# EAGLE board tiny_25_45_85 (EAGLE 6.6.0)
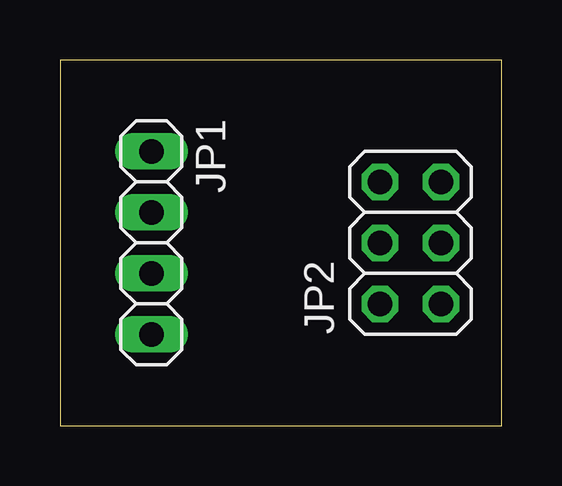
[diagram p0: board, top side]
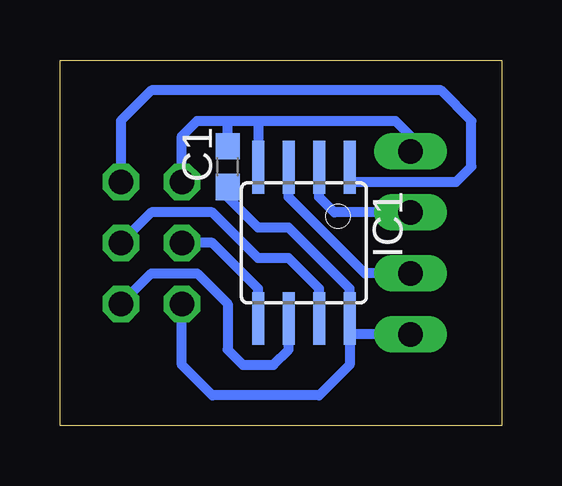
[diagram p1: board, bottom side, seen from below]

Size 18.41 x 15.24 mm. Coordinates in mm from the lower left corner, seen from the top.
Outline: 0,15.24 0,0 18.41,0 18.41,15.24 0,15.24
Copper layers (1*16): Top 0.035mm / dielectric 1.5mm / Bottom 0.035mm
Design rules "plotter *": minimum track width 10mil, minimum drill 24mil, track to track 12mil, track to pad 12mil, pad to pad 12mil, via to via 12mil, smd to smd 8mil, copper to edge 0mil, drill to drill 8mil, minimum pad ring 10mil, minimum via ring 8mil, stop-mask expansion 4mil, vias tented up to drill 0mil, thermal gap 10mil

## Footprints (pad centres in the part's own frame; a part is rotated, then mirrored left to right if it is on the bottom)
C0603 = smd 1.1 x 1: 1 -0.85,0; 2 0.85,0
SOIC8 = smd 0.5 x 2.2: 1 -1.905,-3.154; 2 -0.645,-3.154; 3 0.625,-3.154; 4 1.895,-3.154; 5 1.905,3.154; 6 0.635,3.154; 7 -0.635,3.154; 8 -1.905,3.154
1X04 = drill 1.016 long: 1 -3.81,0; 2 -1.27,0; 3 1.27,0; 4 3.81,0
2X03 = drill 1.016 octagon: 1 -2.54,-1.27; 2 -2.54,1.27; 3 0,-1.27; 4 0,1.27; 5 2.54,-1.27; 6 2.54,1.27

## Placement (x,y rotation side)
C1  [C0603]  11.43,10.79 90 bottom
IC1  TINY22S  [SOIC8]  8.26,7.62 180 bottom
JP1  [1X04]  3.81,7.62 270 top
JP2  [2X03]  14.61,7.62 90 top

## Library data of the parts
C1 = resistor
IC1 = atmel; OC_FARNELL: unknown; OC_NEWARK: unknown
JP1 JP2 = pinhead

## Nets
GND: C1.2 IC1.4 JP1.1 JP2.6
N$1: IC1.3 JP1.3
N$2: IC1.2 JP1.2
N$3: IC1.1 JP2.5
N$7: IC1.5 JP2.4
N$8: IC1.6 JP2.1
N$9: IC1.7 JP2.3
VCC: C1.1 IC1.8 JP1.4 JP2.2

## Tracks (layer width: path | path; a pad name or v marks a point on that pad's centre or on a via)
GND
  Bottom 0.406: JP2.6 13.34,12.06 12.7,12.7 11.43,12.7 | 10.16,12.7 4.45,12.7 3.81,12.06 JP1.1 | C1.2 11.43,12.7 | 11.43,12.7 10.16,12.7 | 10.16,12.7 10.16,10.78 IC1.4
N$1
  Bottom 0.406: JP1.3 5.71,6.35 8.89,9.53 IC1.3
N$2
  Bottom 0.406: JP1.2 6.99,8.89 7.62,9.53 IC1.2
N$3
  Bottom 0.406: IC1.1 6.35,10.16 1.91,10.16 1.27,10.79 1.27,12.7 2.54,13.97 14.61,13.97 15.88,12.7 JP2.5
N$7
  Bottom 0.406: IC1.5 10.16,5.71 12.06,7.62 JP2.4
N$8
  Bottom 0.406: JP2.1 14.61,6.35 12.7,6.35 11.43,5.08 11.43,3.17 10.79,2.54 9.53,2.54 8.89,3.17 IC1.6
N$9
  Bottom 0.406: IC1.7 7.62,5.71 8.89,6.99 10.16,6.99 12.06,8.89 14.61,8.89 JP2.3
VCC
  Bottom 0.406: 6.35,3.81 IC1.8 6.35,5.71 8.89,8.26 10.16,8.26 11.43,9.53 C1.1 | 6.35,3.81 6.35,2.54 7.62,1.27 12.06,1.27 13.34,2.54 JP2.2 | JP1.4 6.35,3.81